# Altium PCB SOIC8_breakout_005.PcbDoc
Units mil, origin at the board's own origin, x right, y up, seen from the top; angles counter-clockwise.
Board outline 1417.32 x 1417.32 mil, 2 copper layers (Top Layer, Bottom Layer); 16 components, 27 nets, 116 pads, 0 vias.
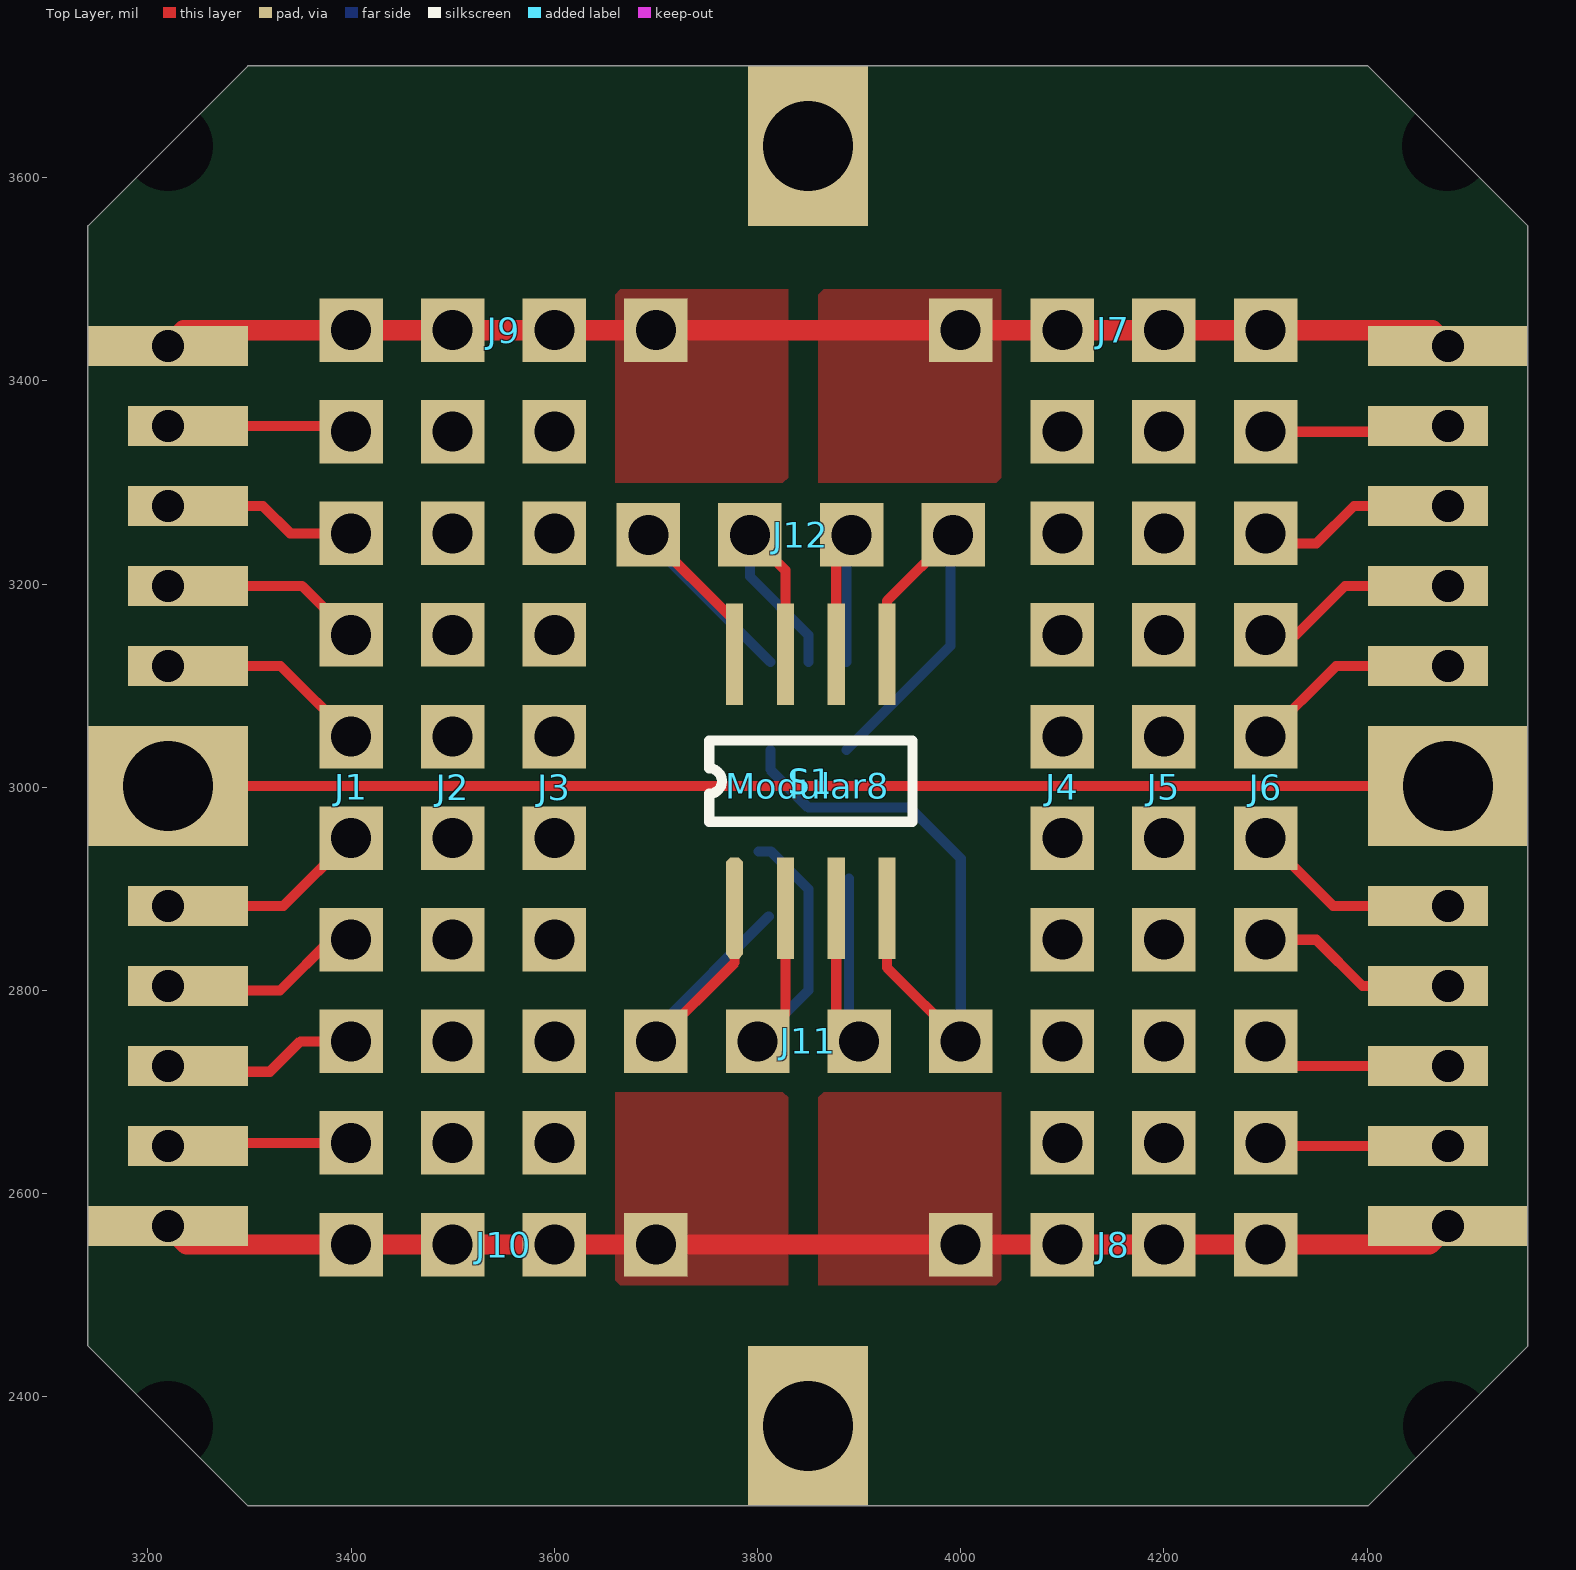
[diagram p0: Top Layer view]
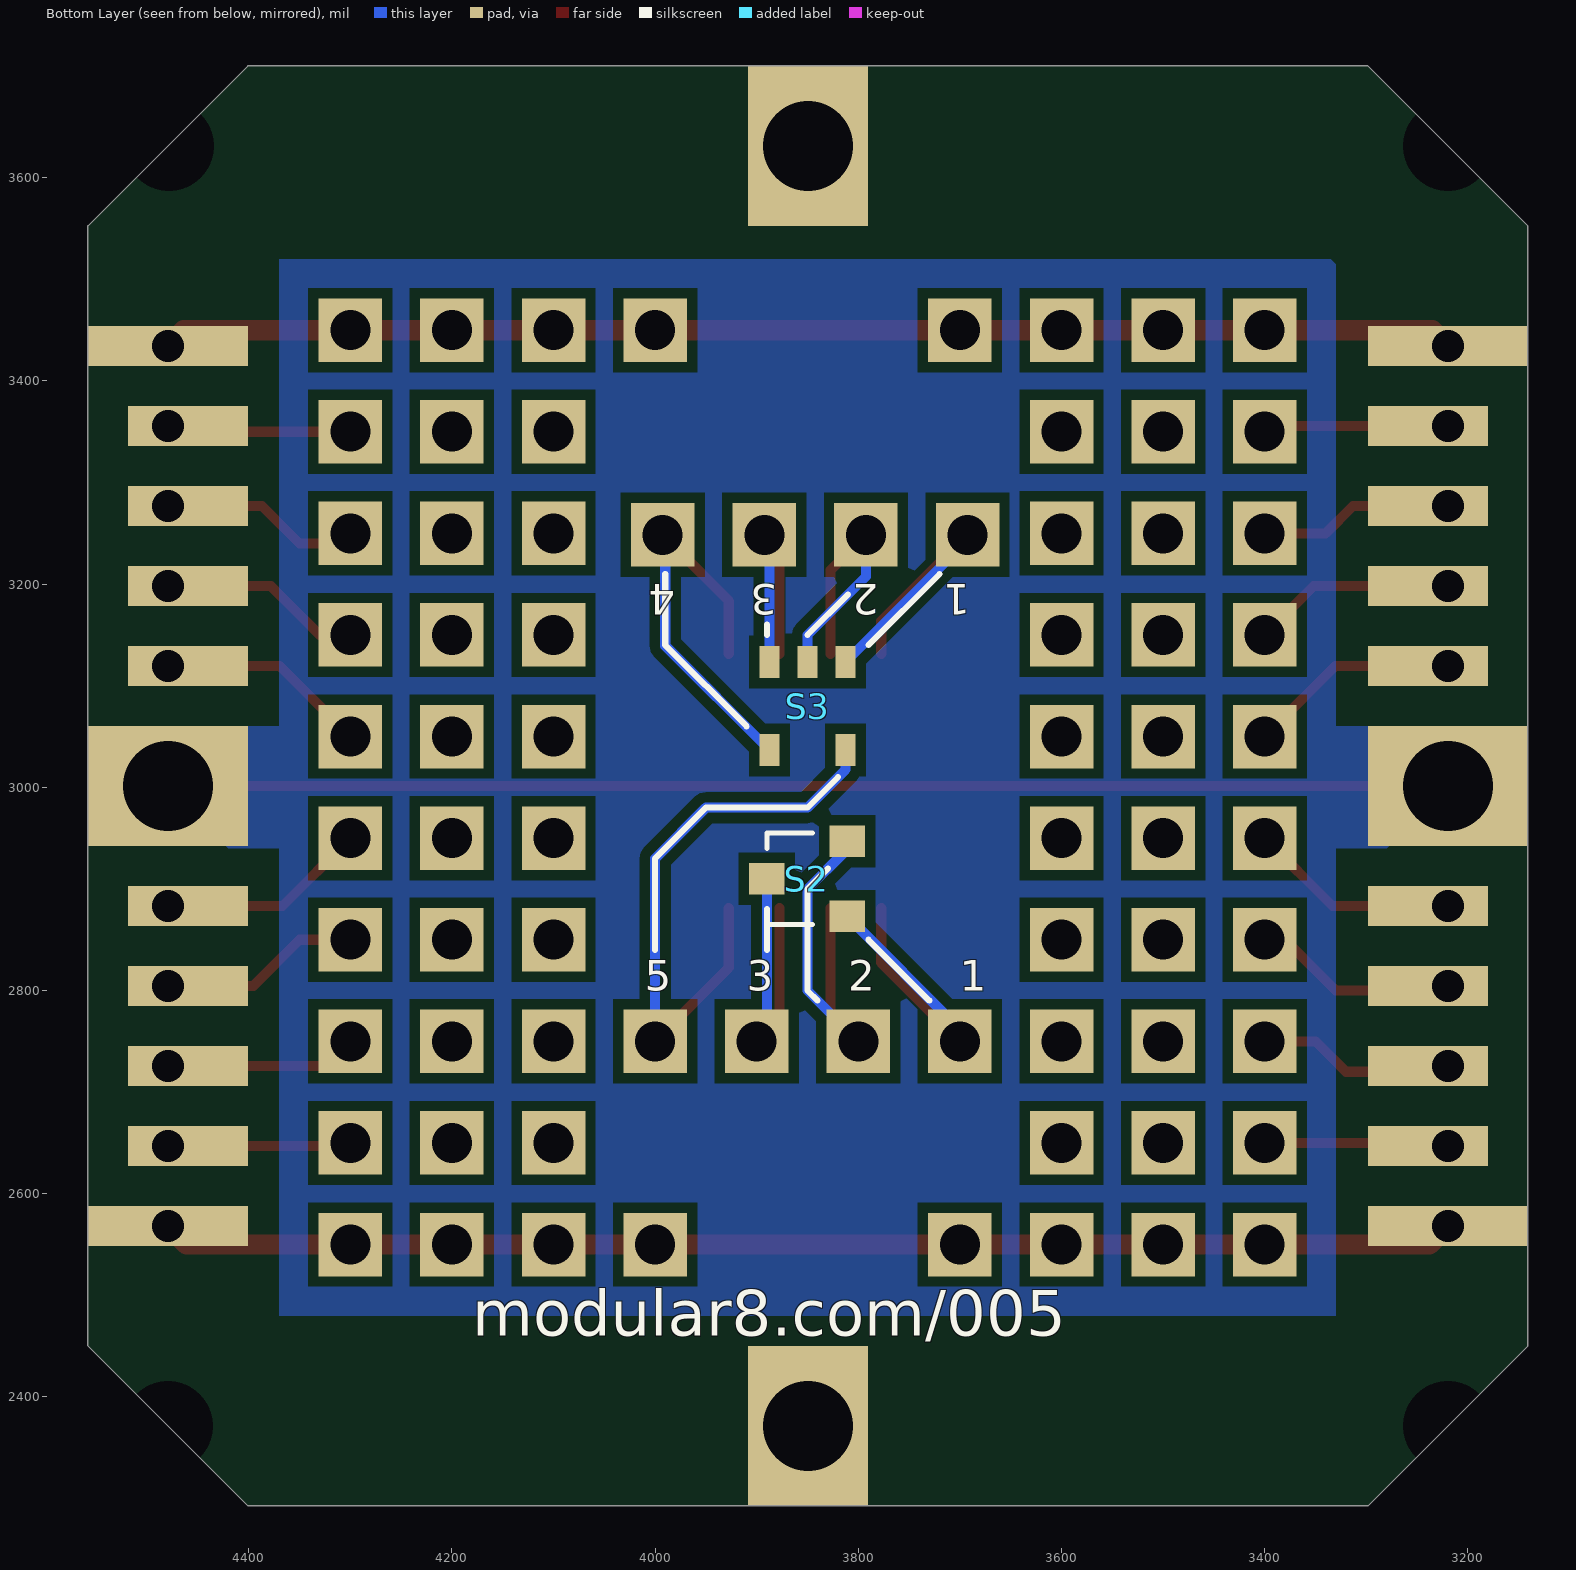
[diagram p1: Bottom Layer view, seen from below]

## Layer stack, top to bottom
Top Solder: solder mask 0.4, Solder Resist, Dk 3.5
Top Layer: signal copper 1.4
Dielectric 1: dielectric 12.6, FR-4, Dk 4.8
Bottom Layer: signal copper 1.4
Bottom Solder: solder mask 0.4, Solder Resist, Dk 3.5

## Board outline
3298.41,2292.74 3140.93,2450.22 3140.93,3552.58 3298.41,3710.06 4400.77,3710.06 4558.25,3552.58 4558.25,2450.22 4400.77,2292.74

## Design rules (kind name [scope] priority, off if disabled: settings)
Clearance [All] p1: gap=10
PolygonConnect [All] p1: connectstyle=Direct reliefconductorwidth=10 reliefentries=4 polygonreliefangle="90 Angle" airgapwidth=10
RoomDefinition SOIC8_breakout [InComponentClass('SOIC8_breakout')] p1: confinementstyle=ConfineIn formatcopy=TRUE lockcomponents=FALSE outline 2828.06,2048.74 4828.06,2048.74 4828.06,3988.75 2828.06,3988.75
RoutingVias [All] p1: holewidth=28 width=50 viastyle="Through Hole" minholewidth=28 minwidth=50 maxholewidth=28 maxwidth=50
SolderMaskExpansion [All] p1: expansion=4
UnpouredPolygon [All] p1: allowunpoured=FALSE
Width [All] p1: maxlimit=20 minlimit=10 preferedwidth=10
29 further rules are at their usual default settings.

## Components (designator, comment, footprint, x,y, rotation, side; value= is the part's Value field where it differs from the comment)
J1 "8x1" "8X1 THRU HOLES 0.1\" PITCH" 3400,3000 r0 top
J2 "8x1" "8X1 THRU HOLES 0.1\" PITCH" 3500,3000 r0 top
J3 "8x1" "8X1 THRU HOLES 0.1\" PITCH" 3600,3000 r0 top
J4 "8x1" "8X1 THRU HOLES 0.1\" PITCH" 4100,3000 r180 top
J5 "8x1" "8X1 THRU HOLES 0.1\" PITCH" 4200,3000 r180 top
J6 "8x1" "8X1 THRU HOLES 0.1\" PITCH" 4300,3000 r180 top
J7 "4x1" "4X1 THRU HOLES 0.1\" PITCH" 4150,3450 r90 top
J8 "4x1" "4X1 THRU HOLES 0.1\" PITCH" 4150,2550 r90 top
J9 "4x1" "4X1 THRU HOLES 0.1\" PITCH" 3550,3450 r90 top
J10 "4x1" "4X1 THRU HOLES 0.1\" PITCH" 3550,2550 r90 top
J11 "4x1" "4X1 THRU HOLES 0.1\" PITCH" 3850,2750 r90 top
J12 "4x1" "4X1 THRU HOLES 0.1\" PITCH" 3842.5,3248.59 r270 top
Modular8 "modular8_rev2_A&C" "MODULAR8 EDGES A & C" 3219.67,2371.48 r0 top
S1 "Generic 8-pin device" SOIC8 3777.43,2881.16 r90 top
S2 "Generic 3-pin device" SOT-23-3 3890,2910 r90 bottom
S3 "Generic 5-pin device" SOT-23-5 3850,3080 r180 bottom

## Footprints (in the part's own frame and the unit in brackets; to place one, negate y for a bottom-side part, rotate by r counter-clockwise, add the part's x,y. Pads: shape width x height; smd on the part's side, far side on the other; paste and mask are expansions set on the pad)
"4X1 THRU HOLES 0.1\" PITCH" [mil]
  rect 62.5x62.5 hole 39.37 unplated: 1(0,150) 2(0,50) 3(0,-50) 4(0,-150)
"8X1 THRU HOLES 0.1\" PITCH" [mil]
  rect 62.5x62.5 hole 39.37: 1(0,350) 2(0,250) 3(0,150) 4(0,50) 5(0,-50) 6(0,-150) 7(0,-250) 8(0,-350)
"MODULAR8 EDGES A & C" [mm]
  rect 0x0 hole 2.25 unplated copper offset 0.5,0: 999(0,0) 999(0,32) 999(31.976,32) 999(32,0)
  rect 3x1 hole 0.8 copper offset 0.5,0: A_0(0,25) A_1(0,23) A_2(0,21) A_3(0,19) A_4(0,13) A_5(0,11) A_6(0,9) A_7(0,7)
  rect 4x3 hole 2.25: A_GND(0,16) C_GND(32,16)
  rect 4x1 hole 0.8: A_V1(0,27) A_V2(0,5) C_V1(32,5) C_V2(32,27)
  rect 3x4 hole 2.25: B_GND(16,0) D_GND(16,32)
  rect 3x1 hole 0.8 copper offset -0.5,0: C_0(32,7) C_1(32,9) C_2(32,11) C_3(32,13) C_4(32,19) C_5(32,21) C_6(32,23) C_7(32,25)
  body extent -2,-2 34,34
SOIC8 [mil]
  oct 100x17 smd: 1(0,0)
  rect 100x17 smd: 2(0,-50) 3(0,-100) 4(0,-150) 5(250,-150) 6(250,-100) 7(250,-50) 8(250,0)
  silkscreen extent 85,-175 165,25
SOT-23-3 [mil]
  rect 31x35 smd: 1(-37,-79) 2(37,-79) 3(0,0)
  silkscreen extent -45,-45 45,0, body extent -57,-100 56,22, height 45
SOT-23-5 [mm]
  rect 0.5x0.8 smd: 1(0.95,1.1) 2(0,1.1) 3(-0.95,1.1) 4(-0.95,-1.1) 5(0.95,-1.1)
  body extent -1.3,-1.6 1.3,1.6, height 1.45

## Nets (pads, with @x,y where several pads share a name; then routed paths per layer and width w, separated by ;. In a path a pad name is that pad's centre, name@x,y a point inside that pad or via, vN(x,y) a via of type N, cw(c..) or ccw(c..) an arc to the next point about the centre after c; other vN are vias at no path point)
GND: Modular8.A_GND Modular8.C_GND | length 1259.8
  Top Layer w10: Modular8.A_GND Modular8.C_GND
NetJ1_1: J1.1 Modular8.A_0 | length 182.7
  Top Layer w10: Modular8.A_0 3394.27,3355.73 J1.1
NetJ1_2: J1.2 Modular8.A_1 | length 191.5
  Top Layer w10: Modular8.A_1 3313.01,3276.99 3340,3250 J1.2
NetJ1_3: J1.3 Modular8.A_2 | length 200.3
  Top Layer w10: Modular8.A_2 3351.75,3198.25 J1.3
NetJ1_4: J1.4 Modular8.A_3 | length 209.1
  Top Layer w10: Modular8.A_3 3330.49,3119.51 J1.4
NetJ1_5: J1.5 Modular8.A_4 | length 208
  Top Layer w10: Modular8.A_4 3333.29,2883.29 J1.5
NetJ1_6: J1.6 Modular8.A_5 | length 202.9
  Top Layer w10: Modular8.A_5 3224.21,2800 3330,2800 3380,2850 J1.6
NetJ1_7: J1.7 Modular8.A_6 | length 195.2
  Top Layer w10: Modular8.A_6 3225.47,2720 3320,2720 3350,2750 J1.7
NetJ1_8: J1.8 Modular8.A_7 | length 181.5
  Top Layer w10: Modular8.A_7 3222.6,2650 J1.8
NetJ6_1: J6.1 Modular8.C_0 | length 180.7
  Top Layer w10: J6.1 4302.93,2647.07 Modular8.C_0
NetJ6_2: J6.2 Modular8.C_1 | length 189.5
  Top Layer w10: J6.2 4324.19,2725.81 Modular8.C_1
NetJ6_3: J6.3 Modular8.C_2 | length 198.3
  Top Layer w10: J6.3 4350,2850 4395.45,2804.55 Modular8.C_2
NetJ6_4: J6.4 Modular8.C_3 | length 207.1
  Top Layer w10: J6.4 4366.71,2883.29 Modular8.C_3
NetJ6_5: J6.5 Modular8.C_4 | length 208.3
  Top Layer w10: J6.5 4369.51,3119.51 Modular8.C_4
NetJ6_6: J6.6 Modular8.C_5 | length 199.5
  Top Layer w10: J6.6 4330,3150 4378.25,3198.25 Modular8.C_5
NetJ6_7: J6.7 Modular8.C_6 | length 199
  Top Layer w10: J6.7 4310,3240 4350,3240 4386.99,3276.99 Modular8.C_6
NetJ6_8: J6.8 Modular8.C_7 | length 181.9
  Top Layer w10: J6.8 4473.78,3350 Modular8.C_7
NetJ11_1: J11.1 S1.1 S2.1 | length 332.2
  Top Layer w10: J11.1 3777.43,2827.43 S1.1
  Bottom Layer w10: J11.1 3700,2762 S2.1
NetJ11_2: J11.2 S1.2 S2.2 | length 377.6
  Top Layer w10: J11.2 3827.43,2777.43 S1.2
  Bottom Layer w10: J11.2 3850,2800 3850,2900 3813,2937 S2.2@3801,2937
NetJ11_3: J11.3 S1.3 S2.3 | length 304.6
  Top Layer w10: S1.3 3877.43,2772.57 J11.3
  Bottom Layer w10: S2.3 3890,2760 J11.3
NetJ11_4: J11.4 S1.4 S3.5 | length 584.1
  Top Layer w10: S1.4 3927.43,2822.57 J11.4
  Bottom Layer w10: S3.5 3812.6,3017.4 3850,2980 3950,2980 4000,2930 J11.4
NetJ12_1: J12.1 S1.5 S3.4 | length 399.8
  Top Layer w10: S1.5 3927.43,3183.52 J12.1
  Bottom Layer w10: S3.4 3990,3139.29 3990,3246.09 J12.1
NetJ12_2: J12.2 S1.6 S3.3 | length 251.1
  Top Layer w10: S1.6 3877.43,3233.52 J12.2
  Bottom Layer w10: S3.3 3887.4,3243.49 J12.2
NetJ12_3: J12.3 S1.7 S3.2 | length 281
  Top Layer w10: J12.3 3827.43,3213.66 S1.7
  Bottom Layer w10: J12.3 3792.5,3207.5 3850,3150 S3.2
NetJ12_4: J12.4 S1.8 S3.1 | length 327.6
  Top Layer w10: J12.4 3777.43,3163.66 S1.8
  Bottom Layer w10: J12.4 3692.5,3243.4 S3.1
VA: J7.1 J7.2 J7.3 J7.4 J9.1 J9.2 J9.3 J9.4 Modular8.A_V1 Modular8.C_V2 | length 1272.7
  Top Layer w20: Modular8.A_V1 3235.2,3450 4463.98,3450 Modular8.C_V2
VB: J8.1 J8.2 J8.3 J8.4 J10.1 J10.2 J10.3 J10.4 Modular8.A_V2 Modular8.C_V1 | length 1275
  Top Layer w20: Modular8.A_V2 3237.99,2550 4461.18,2550 Modular8.C_V1
pads on no net: J2.1 J2.2 J2.3 J2.4 J2.5 J2.6 J2.7 J2.8 J3.1 J3.2 J3.3 J3.4 J3.5 J3.6 J3.7 J3.8 J4.1 J4.2 J4.3 J4.4 J4.5 J4.6 J4.7 J4.8 J5.1 J5.2 J5.3 J5.4 J5.5 J5.6 J5.7 J5.8 Modular8.999 Modular8.B_GND Modular8.D_GND

## Polygon pours and split planes (outlines as drawn)
no net on Top Overlay "Bottom Layer-No Net" (solid, remove dead copper, shelved): 3300,3550 3300,2450 4400,2450 4400,3550
VB on Top Layer "Bottom Layer-No Net" (solid, remove dead copper, pour order 3): 4040,2510 3860,2510 3860,2700 4040,2700
VB on Top Layer "Bottom Layer-No Net" (solid, remove dead copper, pour order 3): 3660,2510 3830,2510 3830,2700 3660,2700 3660,2600
VA on Top Layer "Bottom Layer-No Net" (solid, remove dead copper, pour order 3): 4040,3490 3860,3490 3860,3300 4040,3300
VA on Top Layer "Bottom Layer-No Net" (solid, remove dead copper, pour order 3): 3660,3490 3830,3490 3830,3300 3660,3300 3660,3400
GND on Bottom Layer "Bottom Layer-No Net" (solid, remove dead copper): 4370,2480 4370,2940 4420,2940 4480,3000 4420,3060 4370,3060 4370,3520 3330,3520 3330,3060 3280,3060 3220,3000 3280,2940 3330,2940 3330,2480

## Silkscreen, mask and mechanical layers (free items; w line width, h text height)
Bottom Overlay:
  lines w6: 3720,3210 3790,3140 ; 3730,2790 3790,2850 ; 3810,3190 3850,3150 ; 3820,3010 3850,2980 3950,2980 4000,2930 4000,2840 ; 3830,2920 3850,2900 3850,2800 3840,2790 ; 3890,2840 3890,2880 ; 3890,3150 3890,3160 ; 3910,3060 3990,3140 3990,3210
  text "1" at 3690,3200 h30 r180
  text "2" at 3780,3200 h30 r180
  text "3" at 3880,3200 h30 r180
  text "4" at 3980,3200 h30 r180
  text "1" at 3700,2800 h30
  text "2" at 3810,2800 h30
  text "3" at 3910,2800 h30
  text "5" at 4010,2800 h30
  text "modular8.com/005" at 4180,2460 h45
Top Solder:
  rectangle: 3660,3300 4030,3490
  rectangle: 3660,2510 4040,2700
Bottom Solder:
  rectangle: 3660,3300 4040,3490
  rectangle: 3660,2510 4040,2700